# EAGLE board combo_hv_rlay (EAGLE 7.2.0)
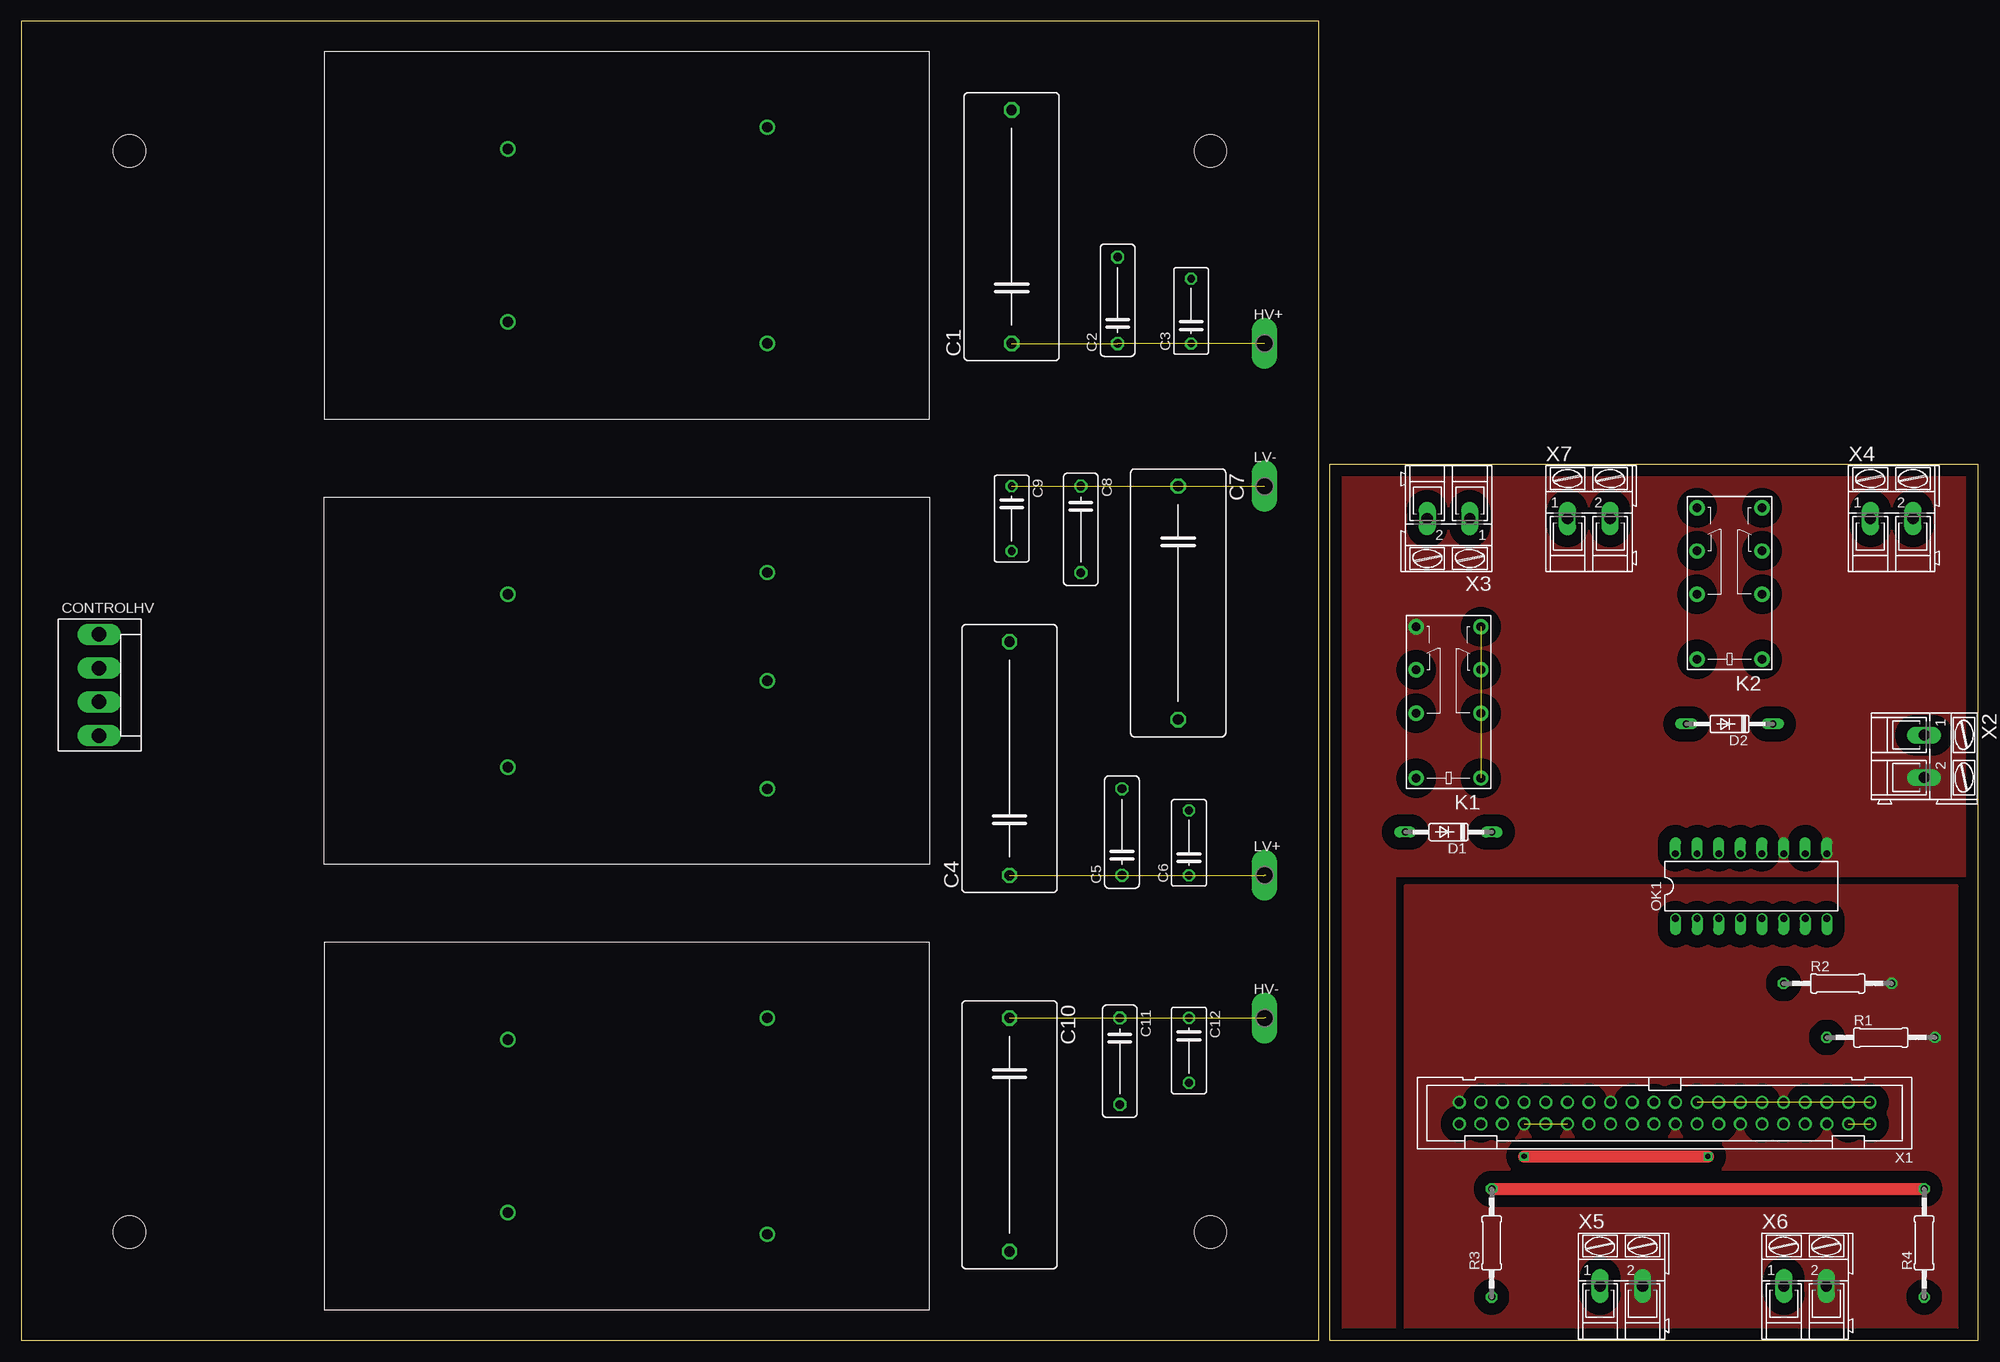
[diagram p0: board, top side]
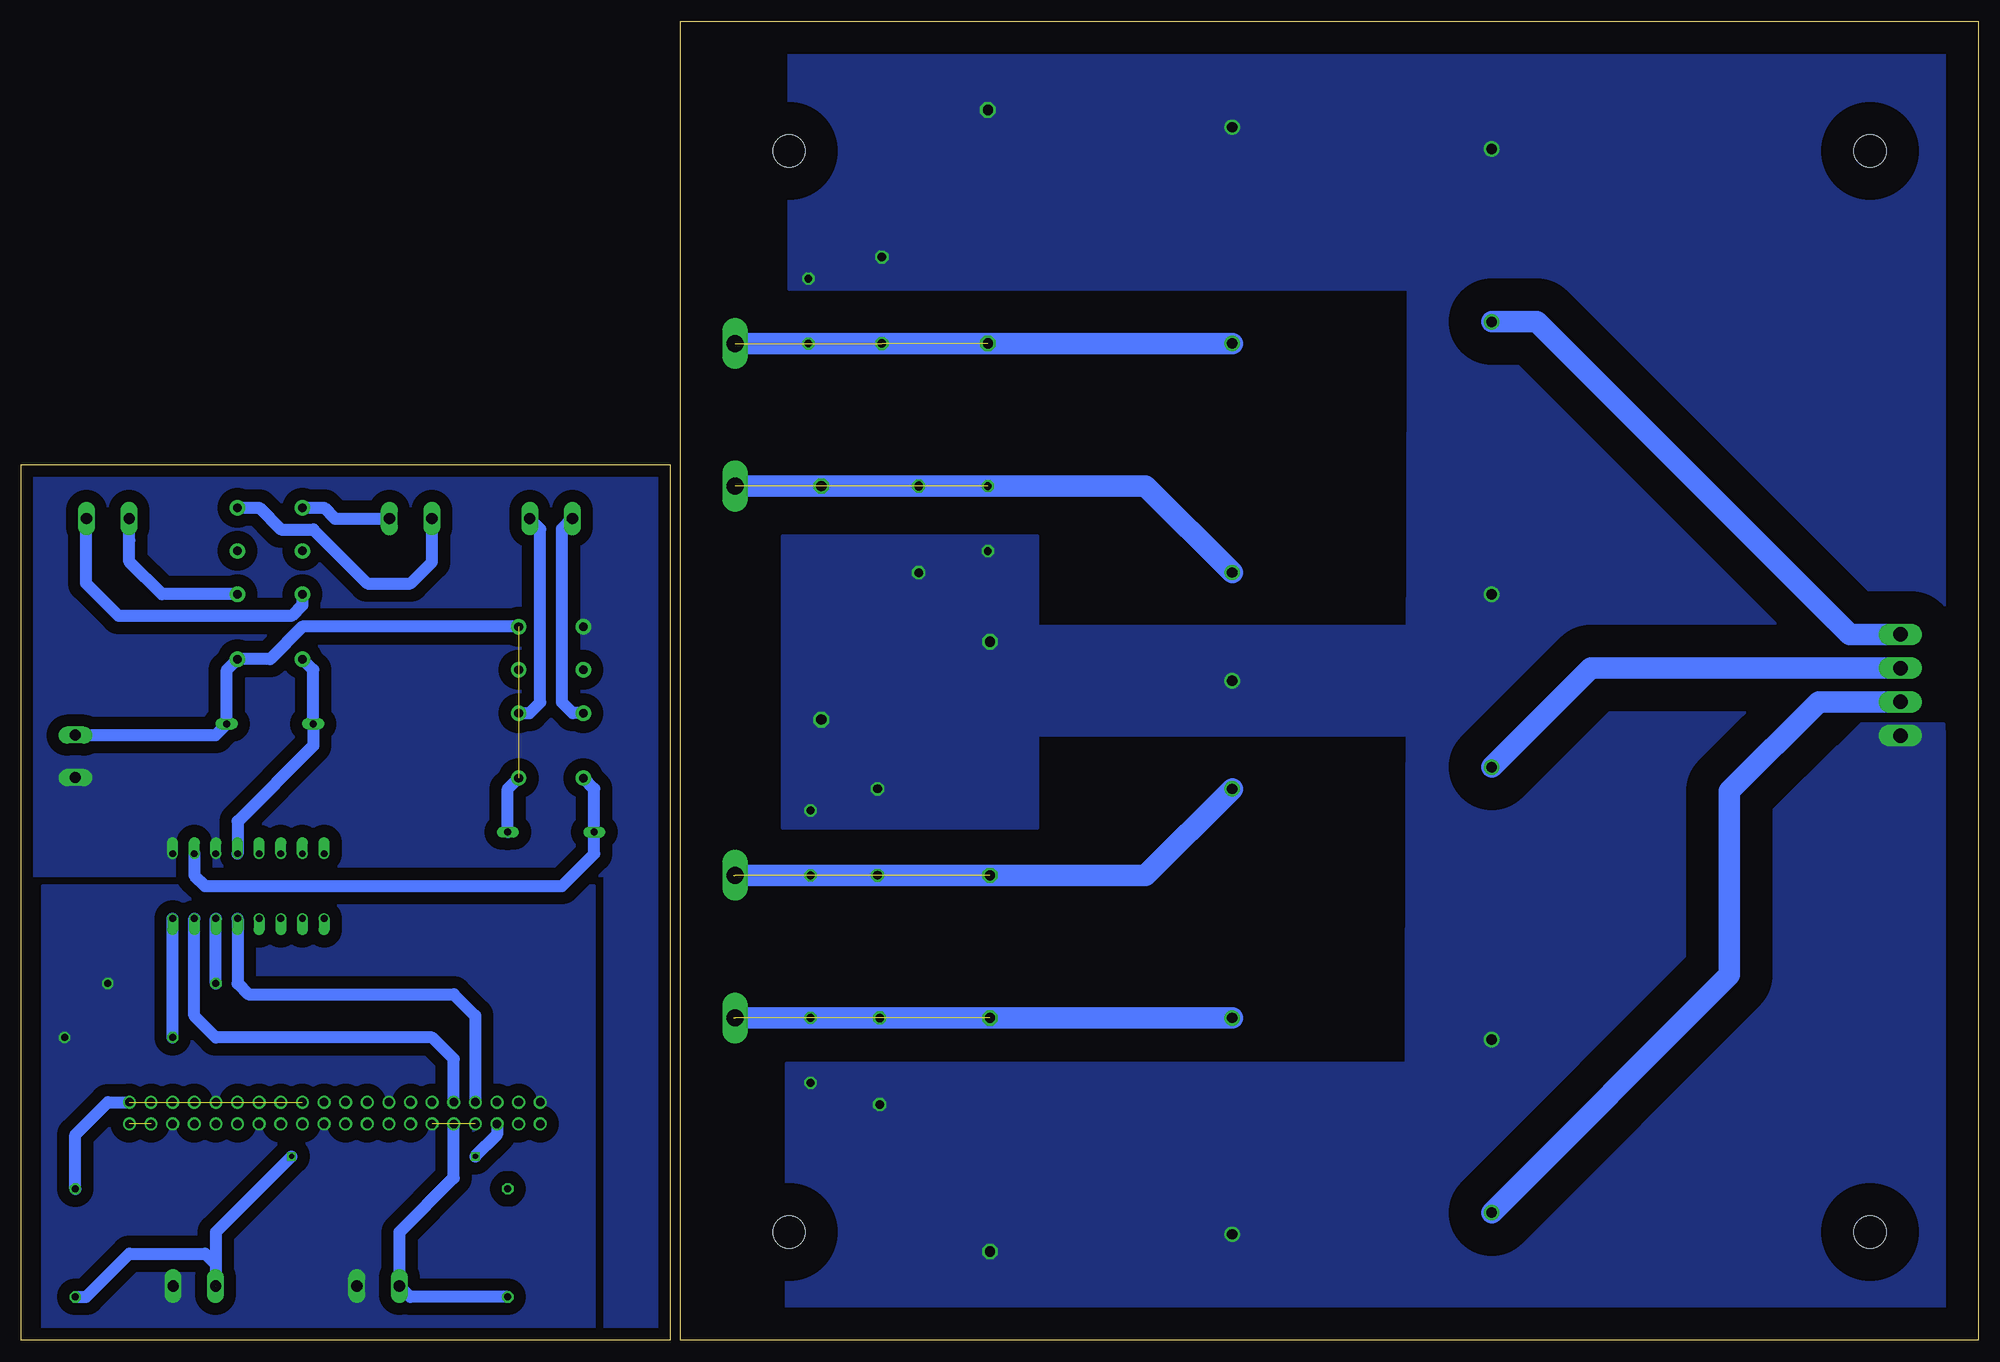
[diagram p1: board, bottom side, seen from below]

Size 229.87 x 154.96 mm. Coordinates in mm from the lower left corner, seen from the top.
Outline: 0,0.02 152.4,0 152.4,154.96 0,154.96 0,0.02
Outline: 229.87,0.02 229.87,102.87 153.67,102.87 153.67,0.02 229.87,0.02
Copper layers (1*16): Top 0.035mm / dielectric 1.5mm / Bottom 0.035mm
Design rules "default": minimum track width 10mil, minimum drill 24mil, track to track 8mil, track to pad 8mil, pad to pad 8mil, via to via 8mil, smd to smd 8mil, copper to edge 40mil, drill to drill 8mil, minimum pad ring 10mil, minimum via ring 8mil, stop-mask expansion 4mil, vias tented up to drill 0mil, thermal gap 10mil
Holes 3.8 mm at 139.7,12.72 139.7,139.72 12.7,12.72 12.7,139.72

## Footprints (pad centres in the part's own frame; a part is rotated, then mirrored left to right if it is on the bottom)
C275-113X316 = drill 1.194 octagon: 1 -13.716,0; 2 13.716,0
C102-043X133 = drill 1.016 octagon: 1 -5.08,0; 2 5.08,0
C075-042X103 = drill 0.914 octagon: 1 -3.81,0; 2 3.81,0
KK-156-4 = drill 1.7 pad 2.184 long: 1 -5.94,0; 2 -1.98,0; 3 1.98,0; 4 5.94,0
DO35-10 = drill 0.813 long: A 5.08,0; C -5.08,0
P1-20Y = drill 2.007 pad 2.54 long: TP 0,0
G5V-2 = drill 1 pad 1.8: 1 -8.89,-3.81; 4 -1.27,-3.81; 6 3.81,-3.81; 8 8.89,-3.81; 9 8.89,3.81; 11 3.81,3.81; 13 -1.27,3.81; 16 -8.89,3.81
DIL16 = drill 0.813 offset: 1 -8.89,-3.81; 2 -6.35,-3.81; 3 -3.81,-3.81; 4 -1.27,-3.81; 5 1.27,-3.81; 6 3.81,-3.81; 7 6.35,-3.81; 8 8.89,-3.81; 9 8.89,3.81; 10 6.35,3.81; 11 3.81,3.81; 12 1.27,3.81; 13 -1.27,3.81; 14 -3.81,3.81; 15 -6.35,3.81; 16 -8.89,3.81
0207/12 = drill 0.813 octagon: 1 -6.35,0; 2 6.35,0
EMCO-F = drill 1.2: P$1 0,0; P$2 0,20.32; P$3 30.48,-2.54; P$4 30.48,22.86
EMCO-F*CT = drill 1.2: P$1 0,0; P$2 0,20.32; P$3 30.48,-2.54; P$4 30.48,22.86; P$5 30.48,10.16
PAK100/2500-40 = drill 1 pad 1.422: 1 -24.13,-1.27; 2 -24.13,1.27; 3 -21.59,-1.27; 4 -21.59,1.27; 5 -19.05,-1.27; 6 -19.05,1.27; 7 -16.51,-1.27; 8 -16.51,1.27; 9 -13.97,-1.27; 10 -13.97,1.27; 11 -11.43,-1.27; 12 -11.43,1.27; 13 -8.89,-1.27; 14 -8.89,1.27; 15 -6.35,-1.27; 16 -6.35,1.27; 17 -3.81,-1.27; 18 -3.81,1.27; 19 -1.27,-1.27; 20 -1.27,1.27; 21 1.27,-1.27; 22 1.27,1.27; 23 3.81,-1.27; 24 3.81,1.27; 25 6.35,-1.27; 26 6.35,1.27; 27 8.89,-1.27; 28 8.89,1.27; 29 11.43,-1.27; 30 11.43,1.27; 31 13.97,-1.27; 32 13.97,1.27; 33 16.51,-1.27; 34 16.51,1.27; 35 19.05,-1.27; 36 19.05,1.27; 37 21.59,-1.27; 38 21.59,1.27; 39 24.13,-1.27; 40 24.13,1.27
AK300/2 = drill 1.321 long: 1 -2.515,0; 2 2.489,0

## Placement (x,y rotation side)
C1  1u  [C275-113X316]  116.33,130.83 90 top
C2  .1u  [C102-043X133]  128.78,122.19 90 top
C3  .01u  [C075-042X103]  137.41,120.92 90 top
C4  1u  [C275-113X316]  116.08,68.35 90 top
C5  .1u  [C102-043X133]  129.29,59.71 90 top
C6  .01u  [C075-042X103]  137.16,58.44 90 top
C7  1u  [C275-113X316]  135.89,86.63 270 top
C8  .1u  [C102-043X133]  124.46,95.27 270 top
C9  .01u  [C075-042X103]  116.33,96.54 270 top
C10  1u  [C275-113X316]  116.08,24.15 270 top
C11  .1u  [C102-043X133]  129.03,32.79 270 top
C12  .01u  [C075-042X103]  137.16,34.06 270 top
CONTROLHV  [KK-156-4]  9.14,76.98 270 top
D1  1N4148DO35-10  [DO35-10]  167.64,59.71 180 top
D2  1N4148DO35-10  [DO35-10]  200.66,72.41 180 top
HV+  TPPAD1-20Y  [P1-20Y]  146.05,117.11 0 top
HV-  TPPAD1-20Y  [P1-20Y]  146.05,37.87 0 top
K1  G5V-2  [G5V-2]  167.64,74.95 90 top
K2  G5V-2  [G5V-2]  200.66,88.92 90 top
LV+  TPPAD1-20Y  [P1-20Y]  146.05,54.63 0 top
LV-  TPPAD1-20Y  [P1-20Y]  146.05,100.35 0 top
OK1  PS2501"  [DIL16]  203.2,53.36 0 top
R1  200  [0207/12]  218.44,35.58 0 top
R2  200  [0207/12]  213.36,41.93 0 top
R3  1k  [0207/12]  172.72,11.45 90 top
R4  1k  [0207/12]  223.52,11.45 90 top
U$1  EMCO-F104PIN  [EMCO-F]  57.15,119.65 0 top
U$2  EMCO-F20CT  [EMCO-F*CT]  57.15,67.33 0 top
U$3  EMCO-F104PIN  [EMCO-F]  57.15,15.01 0 top
X1  2540-  [PAK100/2500-40]  193.04,26.69 180 top
X2  [AK300/2]  223.52,68.6 270 top
X3  [AK300/2]  167.64,96.54 180 top
X4  [AK300/2]  219.71,96.54 0 top
X5  [AK300/2]  187.96,6.37 0 top
X6  [AK300/2]  209.55,6.37 0 top
X7  [AK300/2]  184.15,96.54 0 top

## Library data of the parts
C1-C12 = rcl
CONTROLHV = con-molex; OC_FARNELL: unknown; OC_NEWARK: unknown
D1 D2 = diode
HV+ HV- LV+ LV- = testpad
K1 K2 = relay; MPN: G5V-2 5DC; OC_FARNELL: 9949488; OC_NEWARK: 78K5703
OK1 = optocoupler
R1-R4 = resistor
U$1-U$3 = dc-dc-converter
X1 = con-3m; OC_FARNELL: unknown; OC_NEWARK: unknown
X2-X7 = con-ptr500; OC_FARNELL: unknown; OC_NEWARK: unknown

## Nets
+3V3: R3.2 R4.2 X1.1 X1.17
+5V: X1.2 X1.4
+24V: D1.C D2.C K1.1 K1.8 K2.1 X2.1
GND: C1.2 C2.2 C3.2 C4.2 C5.2 C6.2 C7.2 C8.2 C9.2 C10.2 C11.2 C12.2 CONTROLHV.4 U$1.P$2 U$1.P$4 U$2.P$2 U$2.P$5 U$3.P$2 U$3.P$3
GND1: R1.2 R2.2 X1.6 X1.9 X1.14 X1.20 X1.25 X1.30 X1.34 X1.39 X5.2 X6.2
GND2: K1.9 OK1.9 OK1.11 X2.2
GPIO5: X1.29
GPIO6: OK1.7 X1.31
GPIO13: OK1.5 X1.33
GPIO19: X1.35
GPIO20: X1.38
GPIO21: X1.40
GPIO26: X1.37
N$1: C1.1 C2.1 C3.1 HV+.TP U$1.P$3
N$2: C10.1 C11.1 C12.1 HV-.TP U$3.P$4
N$3: OK1.8 R1.1
N$4: OK1.6 R2.1
N$5: C4.1 C5.1 C6.1 LV+.TP U$2.P$3
N$6: C7.1 C8.1 C9.1 LV-.TP U$2.P$4
N$7: R3.1 X1.32 X5.1
N$8: D1.A K1.16 OK1.10
N$9: X1.3
N$10: X1.5
N$11: X1.8
N$12: X1.10
N$13: X1.19
N$14: X1.21
N$15: X1.23
N$16: X1.24
N$17: X1.26
N$18: X1.27
N$19: X1.28
N$20: D2.A K2.16 OK1.12
N$21: K1.4 X3.1
N$22: K1.13 X3.2
N$23: X1.36 X6.1
N$24: R4.1 X6.1
N$25: K2.13 X4.2
N$26: K2.4 X4.1
N$27: K2.8 X7.1
N$28: K2.9 X7.2
VREG1: CONTROLHV.1 U$1.P$1
VREG2: CONTROLHV.2 U$2.P$1
VREG3: CONTROLHV.3 U$3.P$1

## Tracks (layer width: path | path; a pad name or v marks a point on that pad's centre or on a via)
+3V3  (1 unrouted)
  Top 1.422: R3.2 R4.2
  Bottom 1.422: R4.2 223.52,24.15 219.71,27.96 X1.1
+5V  (1 unrouted)
+24V  (1 unrouted)
  Bottom 1.422: D1.C 172.72,64.79 K1.1 | X2.1 207.03,71.11 D2.C 205.74,78.76 K2.1 200.66,80.03 196.85,83.84 K1.8
GND
  pour Bottom (isolate 3.81, no thermals): 0,154.96 66.8,155.21 67.31,0.02 0,0.02
  pour Bottom (no thermals): 4.06,72.41 13.72,72.41 17.02,69.11 4.06,69.11
  pour Bottom (isolate 3.81, no thermals): 66.55,154.96 139.7,154.96 139.7,123.46 66.55,123.46
  pour Bottom (isolate 3.81, no thermals): 66.04,83.84 110.49,83.84 110.49,94.51 140.46,94.51 140.46,60.22 110.49,60.22 110.49,71.14 66.04,71.14
  pour Bottom (isolate 3.81, no thermals): 139.7,32.53 66.29,32.53 66.29,0.02 139.95,0.02 139.95,32.53
GND1  (1 unrouted)
  pour Bottom (isolate 1.422, no thermals): 162.56,0.02 162.56,53.36 227.33,53.36 227.33,0.02
  pour Top (isolate 1.422, no thermals): 162.56,0.02 162.56,53.36 227.33,53.36 227.33,0.02
GND2
  pour Bottom (isolate 1.422, no thermals): 153.67,0.02 153.67,102.89 229.87,102.89 229.87,54.63 161.29,54.63 161.29,0.02
  pour Top (isolate 1.422, no thermals): 153.67,0.02 153.67,102.89 229.87,102.89 229.87,54.63 161.29,54.63 161.29,0.02
GPIO6
  Bottom 1.422: X1.31 179.07,33.04 181.61,35.58 207.01,35.58 209.55,38.12 OK1.7
GPIO13
  Bottom 1.422: OK1.5 204.47,41.93 203.2,40.66 179.07,40.66 176.53,38.12 X1.33
N$1  (3 unrouted)
  Bottom 2.54: U$1.P$3 HV+.TP
N$2  (4 unrouted)
  Bottom 2.54: U$3.P$4 146.18,37.87
N$3
  Bottom 1.422: R1.1 OK1.8
N$4
  Bottom 1.422: R2.1 OK1.6
N$5  (4 unrouted)
  Bottom 2.54: U$2.P$3 97.79,54.63 146.18,54.63
N$6  (4 unrouted)
  Bottom 2.54: U$2.P$4 97.79,100.35 145.92,100.35
N$7
  Bottom 1.422: R3.1 184.18,5.1 X5.1 185.44,12.7 179.07,19.07 X1.32
N$8
  Bottom 1.422: K1.16 162.56,64.79 D1.A 162.56,57.17 166.37,53.36 208.28,53.36 209.55,54.63 OK1.10
N$20
  Bottom 1.422: K2.16 195.58,78.76 D2.A 195.58,69.87 204.47,60.98 OK1.12
N$21
  Bottom 1.422: K1.4 170.18,73.68 168.91,74.95 168.91,95.3 X3.1
N$22
  Bottom 1.422: K1.13 165.1,73.68 166.37,74.95 166.37,95.32 X3.2
N$23  (via drill 0.6)  (1 unrouted)
  Top 1.422: v176.53,21.61 v198.12,21.61
  Bottom 1.422: X1.36 173.99,24.15 v176.53,21.61 | v198.12,21.61 207.01,12.72 207.01,6.37
N$24  (1 unrouted)
  Bottom 1.422: R4.1 222.25,5.1 217.17,10.18 208.28,10.18 207.01,8.91 207.01,6.37
N$25
  Bottom 1.422: K2.13 196.85,86.38 198.12,85.11 218.44,85.11 222.25,88.92 222.25,93.95 X4.2
N$26
  Bottom 1.422: K2.4 213.36,87.65 217.17,91.46 217.17,93.97 X4.1
N$27
  Bottom 1.422: K2.8 201.93,97.81 199.39,95.27 195.58,95.27 189.23,88.92 184.15,88.92 181.61,91.46 181.61,93.97 X7.1
N$28
  Bottom 1.422: K2.9 194.31,97.81 193.04,96.54 X7.2
VREG1
  Bottom 2.54: CONTROLHV.1 15.08,82.92 51.82,119.65 U$1.P$1
VREG2
  Bottom 2.54: CONTROLHV.2 45.52,78.96 U$2.P$1
VREG3
  Bottom 2.54: CONTROLHV.3 18.74,75 29.21,64.54 29.21,42.95 U$3.P$1